# Altium PCB team throttle control.PcbDoc
Units mil, origin at the board's own origin, x right, y up, seen from the top; angles counter-clockwise.
Board outline 2987.01 x 2349.61 mil, 2 copper layers (Top, Bottom); 16 components, 19 nets, 108 pads, 0 vias.
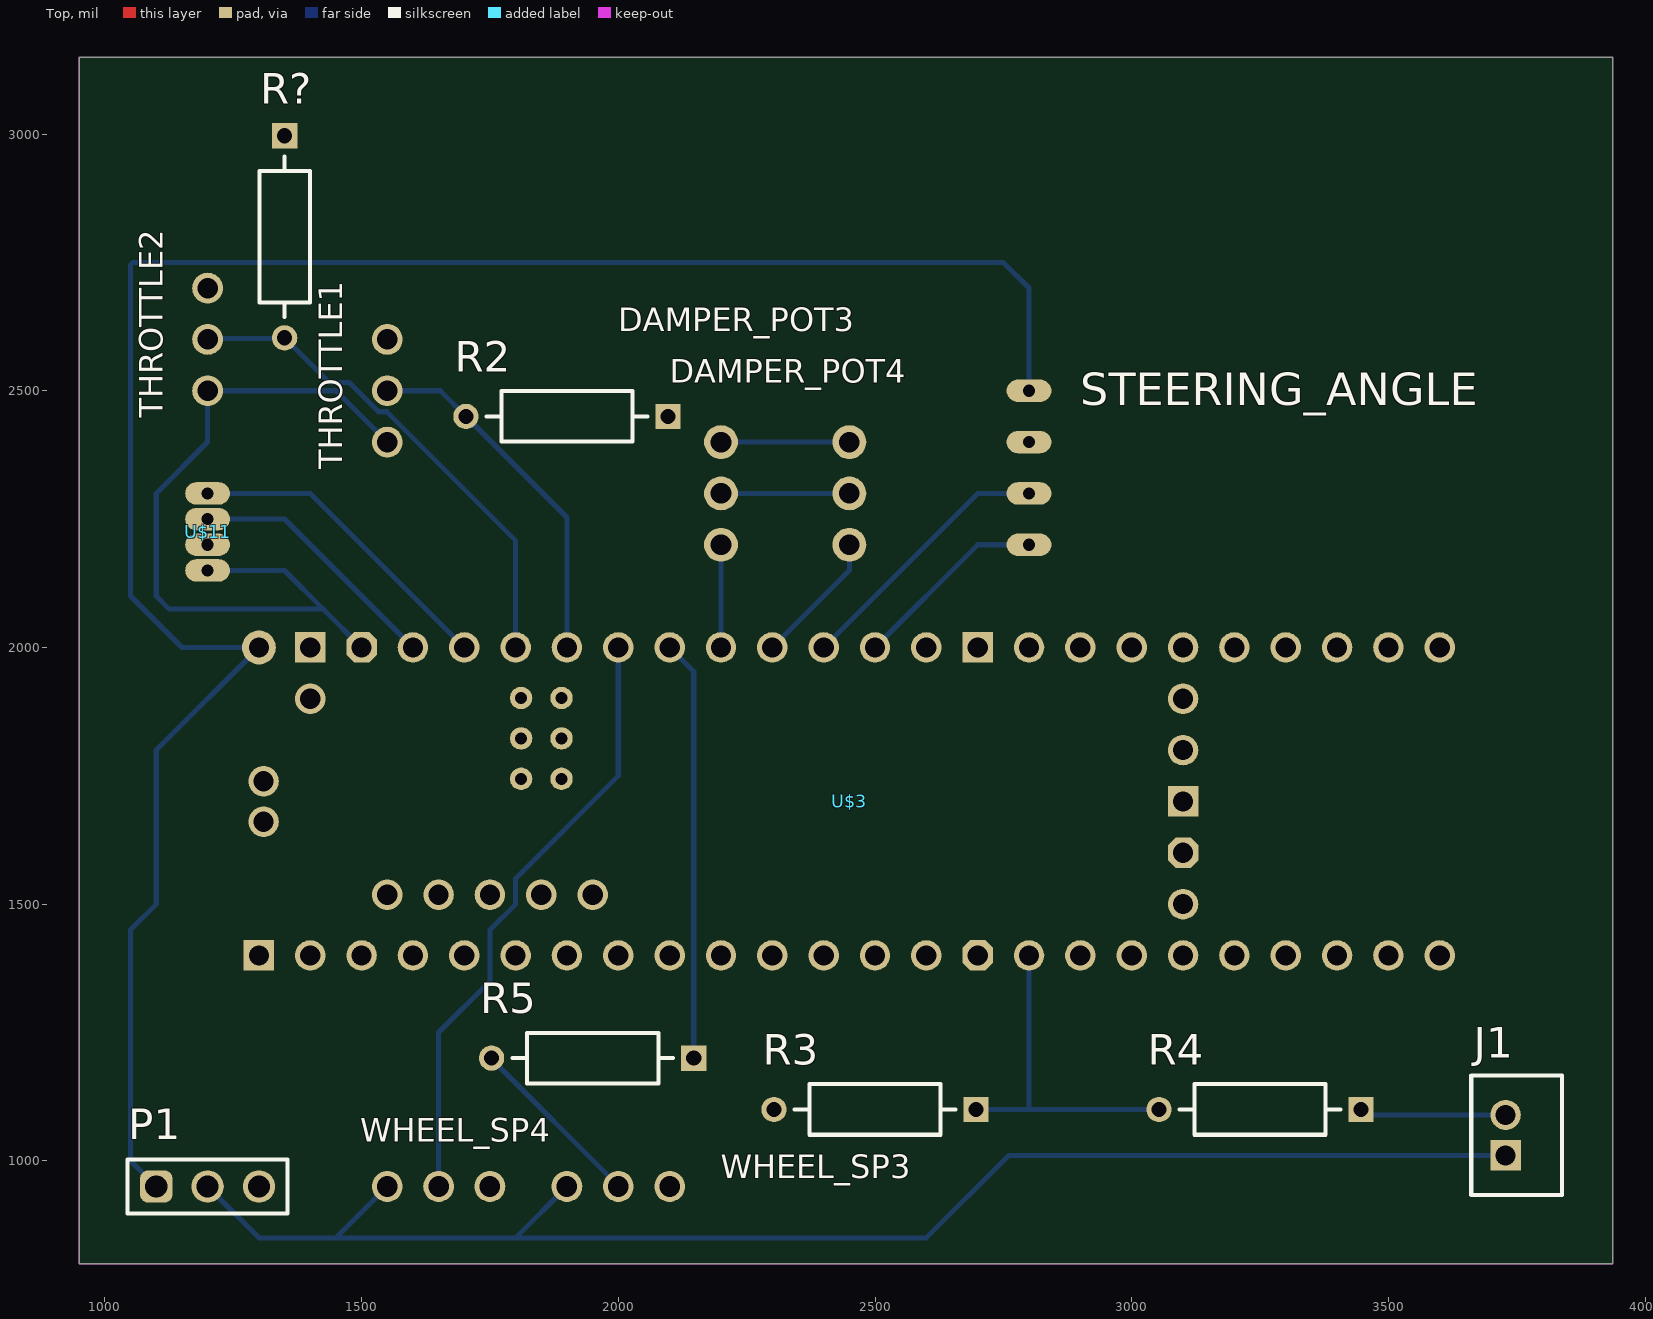
[diagram p0: Top view]
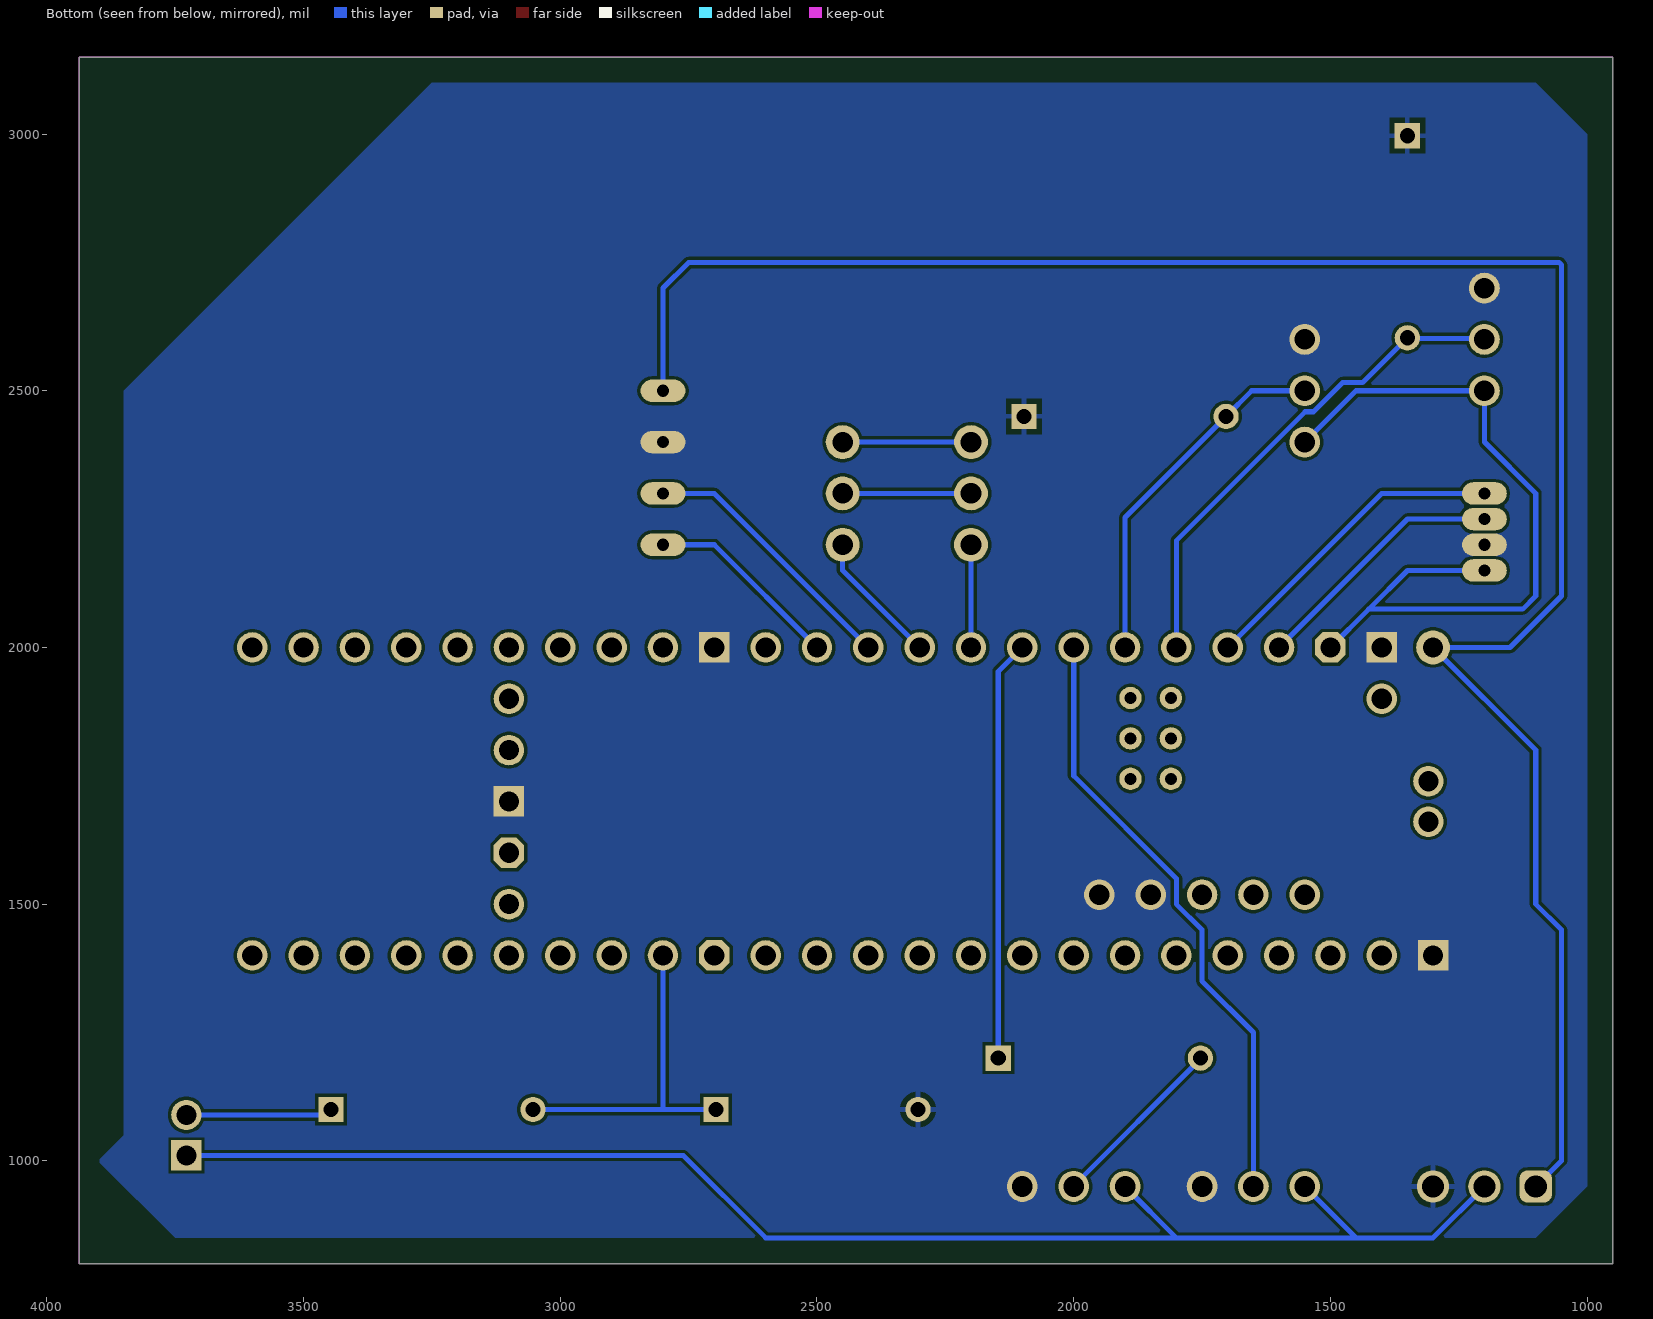
[diagram p1: Bottom view, seen from below]

## Layer stack, top to bottom
Top Solder: solder mask 0.4, Solder Resist, Dk 3.5
Top: signal copper 1.378
Dielectric 1: dielectric 12.6, FR-4, Dk 4.8
Bottom: signal copper 1.378
Bottom Solder: solder mask 0.4, Solder Resist, Dk 3.5

## Board outline
950,3149.61 950,800 3937.01,800 3937.01,3149.61

## Design rules (kind name [scope] priority, off if disabled: settings)
BoardOutlineClearance mdCopperDimension [All] p1: gap=10 ignorepadtopadclearanceinfootprint=FALSE except(0: Arc-SplitContinuation Track-SplitContinuation SMDPad-SplitContinuation THPad-SplitContinuation Via-SplitContinuation Fill-SplitContinuation Poly-SplitContinuation Region-SplitContinuation Text-SplitContinuation; 40: Poly-OutlineEdge Poly-CavityEdge Poly-CutoutEdge Poly-SplitBarrior)
Clearance "Clearance (Same Net)" [All] p1: gap=6 ignorepadtopadclearanceinfootprint=FALSE
Clearance [All] p2: gap=6 ignorepadtopadclearanceinfootprint=FALSE
HoleSize [All] p1: absolutevalues=TRUE maxlimit=100000 minlimit=13.78 maxpercent=80.000 minpercent=20.000
HoleToHoleClearance mdDrill [All] p1: gap=6 allowstackedmicrovias=TRUE
MinimumSolderMaskSliver [All] p1 off: minsoldermaskwidth=10
PasteMaskExpansion mlMinCreamFrame [All] p1: expansion=0
PolygonConnect PolygonConnect_For_PolygonThermal_ON_Width120000_Gap100000 [InPolygonClass('PolygonThermal_ON_Width120000_Gap100000') vs Not IsVia] p1: connectstyle=Relief reliefconductorwidth=12 reliefentries=4 polygonreliefangle="90 Angle" airgapwidth=10
PolygonConnect ThermalVias [IsVia] p2: connectstyle=Direct reliefconductorwidth=10 reliefentries=4 polygonreliefangle="90 Angle" airgapwidth=10
PolygonConnect [All] p3: connectstyle=Relief reliefconductorwidth=10 reliefentries=4 polygonreliefangle="90 Angle" airgapwidth=10
RoutingVias [All] p1: holewidth=13.78 width=29.78 viastyle="Through Hole" minholewidth=13.78 minwidth=29.78 maxholewidth=100 maxwidth=100
SolderMaskExpansion mlMinStopFrame [All] p1: expansion=4 istentingtop=FALSE
Width [All] p1: maxlimit=10 minlimit=6 preferedwidth=6
26 further rules are at their usual default settings.

## Components (designator, comment, footprint, x,y, rotation, side; value= is the part's Value field where it differs from the comment)
DAMPER_POT3 "" 1X03-CLEANBIG 2450,2300 r270 top
DAMPER_POT4 "" 1X03-CLEANBIG 2200,2300 r270 top
J1 "Break Switch" JST-B2B-PH-K-S_V 3750,1050 r90 top
P1 "Power header" 61300311121 1200,950 r0 top
R2 "470K" FP-MRS25-MFG 1900,2450 r180 top
R3 "3.3K" FP-MRS25-MFG 2500,1100 r180 top
R4 "100K" FP-MRS25-MFG 3250,1100 r180 top
R5 "1K" FP-MRS25-MFG 1950,1200 r180 top
R? "47K" FP-MRS25-MFG 1350,2800 r270 top
STEERING_ANGLE "" ROTARY_ENCODER 2750,2350 r0 top
THROTTLE1 "" 1X03 1550,2500 r90 top
THROTTLE2 "" 1X03 1200,2600 r90 top
U$3 "" TEENSY41 2500,1700 r0 top
U$11 "" CAN_TEN 1250,2050 r90 top
WHEEL_SP3 "" 1X03 2000,950 r0 top
WHEEL_SP4 "" 1X03 1650,950 r0 top

## Footprints (in the part's own frame and the unit in brackets; to place one, negate y for a bottom-side part, rotate by r counter-clockwise, add the part's x,y. Pads: shape width x height; smd on the part's side, far side on the other; paste and mask are expansions set on the pad)
1X03 [mil] "1X03"
  round 60 hole 40: 1(-100,0) 2(0,0) 3(100,0)
1X03-CLEANBIG [mil] "1X03-CLEANBIG"
  round 66 hole 40: 1(-100,0) 2(0,0) 3(100,0)
61300311121 [mm] "Pin Header, pitch 2.54 mm, THT, Vertical, single row, 3p"
  rrect50% 1.6x1.6 hole 1.1: 1(-2.54,0)
  round 1.6 hole 1.1: 2(0,0) 3(2.54,0)
  silkscreen extent -3.96,-1.35 3.96,1.35, body extent -3.81,-1.27 3.81,1.27, height 8.57
CAN_TEN [mil] "CAN_TEN"
  oval 43.62x87.24 hole 23.62: P$1(100,50) P$2(150,50) P$3(200,50) P$4(250,50)
FP-MRS25-MFG [mm]
  rect 1.25x1.25 hole 0.75 paste-2539.97 mask+0: 1(-5,0)
  round 1.25 hole 0.75 paste-2539.97 mask+0: 2(5,0)
  silkscreen extent -3.98,-1.25 3.98,1.25, body extent -5.72,-1.35 5.72,1.35, height 0.25
JST-B2B-PH-K-S_V [mm] "Connector, 2-Leads, Body 5.9x4.5mm, Pitch 2mm"
  rect 1.5x1.5 hole 1: 1(-1,0.55)
  round 1.5 hole 1: 2(1,0.55)
  silkscreen extent -2.95,-2.25 2.95,2.25, body extent -2.95,-2.25 2.95,2.25, height 6
ROTARY_ENCODER [mil] "ROTARY_ENCODER"
  oval 87.24x43.62 hole 23.62: GND(50,50) PH_A(50,-150) PH_B(50,-50) VCC(50,150)
TEENSY41 [mm] "TEENSY41"
  round 1.508 hole 1: 0-RX1/CS1/CRX2(-27.94,-7.62) 1-TX1/MISO1/CTX2(-25.4,-7.62) 2-OUT2(-22.86,-7.62) 3-LRCLK2(-20.32,-7.62) 4-BCLK2(-17.78,-7.62) 5-IN2(-15.24,-7.62) 6-OUT1D(-12.7,-7.62) 7-RX2/OUT1A(-10.16,-7.62) 8-TX2/IN2(-7.62,-7.62) 9-OUT1C(-5.08,-7.62) 10-CS\MQSR(-2.54,-7.62) 11-MOSI/CTX1(0,-7.62) 12-MISO/MQSL(2.54,-7.62) 13-SCK/LED(2.54,7.62) 14-A0/TX3/SPDIF_OUT(0,7.62) 15-A1/RX3/SPDIF_IN(-2.54,7.62) 16-A2/RX4/SCL1(-5.08,7.62) 17-A3/TX4/SDA1(-7.62,7.62) 18-A4/SDA0(-10.16,7.62) 19-A5/SCL0(-12.7,7.62) 20-A6/TX5/LRCLK1(-15.24,7.62) 21-A7/RX5/BCLK1(-17.78,7.62) 22-A8/CTX1(-20.32,7.62) 23-A9/CRX1/MCLK1(-22.86,7.62) 24-A10/TX6/SCL2(7.62,-7.62) 25-A11/RX6/SDA2(10.16,-7.62) 26-A12/MOSI1(12.7,-7.62) 27-A13/SCK1(15.24,-7.62) 28-RX7(17.78,-7.62) 29-TX7(20.32,-7.62) 30-CRX3(22.86,-7.62) 31-CTX3(25.4,-7.62) 32-OUT1B(27.94,-7.62) 33-MCLK2(27.94,7.62) 34-RX8(25.4,7.62) 35-TX8(22.86,7.62) 36-PWM(20.32,7.62) 37-PWM(17.78,7.62) 38-A14/CS/IN1(15.24,7.62) 39-A15/CS/OUT1A(12.7,7.62) 40-A16/CS1(10.16,7.62) 41-A17/MISO1(7.62,7.62) +5V(-24.13,-4.62) D+(-30.25,-1) D-(-30.25,1) DM(-21.59,-4.62) DP(-19.05,-4.62) GND4(-16.51,-4.62) GND5(-13.97,-4.62) ON/OFF(15.24,5.08) PROGRAM(15.24,2.54) VBAT(15.24,-5.08) VUSB(-27.94,5.08)
  oct 1.508x1.508 / inner round 1.393 / far side oct 1.508x1.508 hole 1: 3V3-1(5.08,-7.62) 3V3-2(15.24,-2.54) 3V3-3(-25.4,7.62)
  round 1.108 hole 0.6: G(-15.51,3.12) LED(-17.51,3.12) R+(-17.51,5.12) R-(-15.51,5.12) T+(-15.51,1.12) T-(-17.51,1.12)
  rect 1.508x1.508 / inner round 1.393 / far side rect 1.508x1.508 hole 1: GND1(-30.48,-7.62) GND2(15.24,0) GND3(5.08,7.62) GND6(-27.94,7.62)
  round 1.676 hole 1: VIN(-30.48,7.62)

## Part data
DAMPER_POT3 DAMPER_POT4: library part PINHD-1X3CB, "PIN HEADER", DeviceName=CB, DeviceSetName=PINHD-1X3, GateName_1=A, LibraryName=adafruit, SymbolName_1=PINHD3
J1: library part CMP-2000-05162-1, "Male Header, Pitch 2 mm, 1 x 2 Position, Height 6 mm, Tail Length 3.4 mm, -25 to 85 degC, RoHS, Bulk", Manufacturer=JST, Datasheet URL=http://datasheet.octopart.com/B2B-PH-K-S%28LF%29%28SN%29-JST-datasheet-8324864.pdf, Datasheet Version=Nov-08, Manufacturer URL=http://www.jst.com/home2.html, No of Positions=2, Pitch=2mm, Style/Orientation=StraightHeader/Plug, Termination=Crimp, Type=ShroudedHeader
P1: library part CMP-1502-01062-2, Color=Black, Contact Resistance=20mΩ, Current Rating=3A, Max Operating Temperature=105°C, Min Operating Temperature=-40°C, Operating Supply Voltage=250V, Connector Type="Male Pin", Contact Material=Copper, Contact Mating Length=5.9944mm, Contact Plating=Gold, Gender=Male, Height=8.94mm, Lead Free="Lead Free", Lead Pitch=2.54mm, Mount="Through Hole", NexarPartId=32855521, Number of Contacts=3, Number of Pins=3, Number of Positions=3, Number of Rows=1, Orientation=Vertical, Packaging=Bulk, Pitch=2.54mm, REACH SVHC=Unknown, RoHS=Compliant, Termination=Solder, Voltage Rating=250V
R2 R3 R4 R5 R?: library part CMP-00030-42757237-1, "MRS25000C1000FRP00 Resistor, 100 Ohm, ± 1%, 600 mW, Axial Leaded, Metal Film (Thin Film), Professional", Case/Package=Axial, Max Operating Temperature=155°C, Max Power Dissipation=600mW, Min Operating Temperature=-55°C, Resistance=100Ω, Temperature Coefficient=50ppm/°C, Tolerance=1%, Voltage Rating=350V, Composition="Metal Film, Thin Film", Contact Plating=Tin, Diameter=2.5mm, Lead Diameter=600µm, Lead Free="Lead Free", Length=6.5mm, Military Standard=Not, Mount="Through Hole", NexarPartId=42757237, Number of Pins=2, Number of Terminations=2, Packaging="Tape & Reel (TR)", Power Rating=600mW, Radiation Hardening=No, REACH SVHC=Unknown, RoHS=Compliant, Schedule B="8533210090, 8533210090", Termination=Axial, Voltage Rating (DC)=350V, Width=2.5mm
STEERING_ANGLE: library part ROTARY_ENCODER, DeviceSetName=ROTARY_ENCODER, GateName_1=G$1, LibraryName="F-E library custom components", SymbolName_1=ROTARY_ENCODER
THROTTLE1 THROTTLE2 WHEEL_SP3 WHEEL_SP4: library part PINHD-1X3, "PIN HEADER", DeviceSetName=PINHD-1X3, GateName_1=A, LibraryName=adafruit, SymbolName_1=PINHD3
U$3: library part TEENSY41, DeviceSetName=TEENSY41, GateName_1=G$1, LibraryName=teensy, SymbolName_1=TEENSY41, TEENSY4.1="TEENSY 4.1"
U$11: library part CAN_TEE, DeviceSetName=CAN_TEE, GateName_1=G$1, LibraryName="F-E library custom components", SymbolName_1=CAN_TEN

## Nets (pads, with @x,y where several pads share a name; then routed paths per layer and width w, separated by ;. In a path a pad name is that pad's centre, name@x,y a point inside that pad or via, vN(x,y) a via of type N, cw(c..) or ccw(c..) an arc to the next point about the centre after c; other vN are vias at no path point)
3.3V: THROTTLE1.1 THROTTLE2.1 U$3.3V3-3 U$11.P$1 | length 1530.9
  Bottom w10: U$11.P$1 1350,2150 1425.41,2074.59 ; U$3.3V3-3 1425.41,2074.59 ; THROTTLE1.1 1450,2500 THROTTLE2.1 1200,2400 1100,2300 1100,2100 1125.41,2074.59 1425.41,2074.59
5V: P1.1 STEERING_ANGLE.VCC U$3.VIN | length 4083.7
  Bottom w10: P1.1 1050,1000 1050,1450 1100,1500 1100,1800 U$3.VIN 1150,2000 1050,2100 1050,2745.31 1054.69,2750 2750,2750 2800,2700 STEERING_ANGLE.VCC
12V: J1.1 P1.2 WHEEL_SP3.1 WHEEL_SP4.1 | length 2919.1
  Bottom w10: P1.2 1300,850 1450,850 ; WHEEL_SP4.1 1450,850 ; WHEEL_SP3.1 1800,850 ; J1.1 2760.63,1010.63 2600,850 1800,850 ; 1450,850 1800,850
A2_2: DAMPER_POT3.3 U$3.16-A2/RX4/SCL1 | length 262.1
  Bottom w10: U$3.16-A2/RX4/SCL1 2450,2150 DAMPER_POT3.3
ACC_DATA_OUT_1: R2.2 THROTTLE1.2 U$3.20-A6/TX5/LRCLK1 | length 707.6
  Bottom w10: THROTTLE1.2@1551.57,2501.57 THROTTLE1.2 1653.15,2500 R2.2 1900,2253.15 U$3.20-A6/TX5/LRCLK1
ACC_DATA_OUT_2: R?.2 THROTTLE2.2 U$3.21-A7/RX5/BCLK1 | length 973
  Bottom w10: THROTTLE2.2 1201.57,2601.57 1348.43,2601.57 R?.2 1437.15,2516 1476.02,2516 1533.02,2459 1548.98,2459 1800,2207.98 U$3.21-A7/RX5/BCLK1
BL_GND: DAMPER_POT3.2 DAMPER_POT4.2 | length 250
  Bottom w10: DAMPER_POT4.2 DAMPER_POT3.2
BR_SW: R3.1 R4.2 U$3.24-A10/TX6/SCL2 | length 656.3
  Bottom w10: R3.1 2800,1100 ; U$3.24-A10/TX6/SCL2 2800,1100 ; R4.2 2800,1100
BR_VCC: DAMPER_POT3.1 DAMPER_POT4.1 | length 250
  Bottom w10: DAMPER_POT4.1 DAMPER_POT3.1
CRX_2: U$3.23-A9/CRX1/MCLK1 U$11.P$3 | length 503.6
  Bottom w10: U$11.P$3 1350,2250 U$3.23-A9/CRX1/MCLK1
CTX_2: U$3.22-A8/CTX1 U$11.P$4 | length 624.3
  Bottom w10: U$11.P$4 1400,2300 U$3.22-A8/CTX1
GND: P1.3 R2.1 R3.2 R?.1 STEERING_ANGLE.GND THROTTLE1.3 THROTTLE2.3 U$3.GND1 U$3.GND2 U$3.GND3 U$3.GND4 U$3.GND5 U$3.GND6 U$11.P$2 WHEEL_SP3.3 WHEEL_SP4.3
NetDAMPER_POT4_3: DAMPER_POT4.3 U$3.17-A3/TX4/SDA1 | length 200
  Bottom w10: U$3.17-A3/TX4/SDA1 DAMPER_POT4.3
NetJ1_2: J1.2 R4.1 | length 285.9
  Bottom w10: R4.1 3457.48,1089.37 J1.2
NetR5_1: R5.1 U$3.18-A4/SDA0 | length 819.4
  Bottom w10: U$3.18-A4/SDA0 2146.85,1953.15 R5.1
NetR5_2: R5.2 WHEEL_SP3.2 | length 352.2
  Bottom w10: R5.2 1753.15,1198.43 2000,951.57 WHEEL_SP3.2
T2_DP_1: STEERING_ANGLE.PH_A U$3.14-A0/TX3/SPDIF_OUT | length 382.8
  Bottom w10: U$3.14-A0/TX3/SPDIF_OUT 2700,2200 STEERING_ANGLE.PH_A
T2_DP_2: STEERING_ANGLE.PH_B U$3.15-A1/RX3/SPDIF_IN | length 524.3
  Bottom w10: U$3.15-A1/RX3/SPDIF_IN 2700,2300 STEERING_ANGLE.PH_B
WH_SP4_D: U$3.19-A5/SCL0 WHEEL_SP4.2 | length 1195
  Bottom w10: WHEEL_SP4.2 1650,1250 1750,1350 1750,1450 1800,1500 1800,1550 2000,1750 U$3.19-A5/SCL0
pads on no net: U$3.0-RX1/CS1/CRX2 U$3.1-TX1/MISO1/CTX2 U$3.2-OUT2 U$3.3-LRCLK2 U$3.3V3-1 U$3.3V3-2 U$3.4-BCLK2 U$3.5-IN2 U$3.6-OUT1D U$3.7-RX2/OUT1A U$3.8-TX2/IN2 U$3.9-OUT1C U$3.10-CS\MQSR U$3.11-MOSI/CTX1 U$3.12-MISO/MQSL U$3.13-SCK/LED U$3.25-A11/RX6/SDA2 U$3.26-A12/MOSI1 U$3.27-A13/SCK1 U$3.28-RX7 U$3.29-TX7 U$3.30-CRX3 U$3.31-CTX3 U$3.32-OUT1B U$3.33-MCLK2 U$3.34-RX8 U$3.35-TX8 U$3.36-PWM U$3.37-PWM U$3.38-A14/CS/IN1 U$3.39-A15/CS/OUT1A U$3.40-A16/CS1 U$3.41-A17/MISO1 U$3.+5V U$3.D+ U$3.D- U$3.DM U$3.DP U$3.G U$3.LED U$3.ON/OFF U$3.PROGRAM U$3.R+ U$3.R- U$3.T+ U$3.T- U$3.VBAT U$3.VUSB

## Polygon pours and split planes (outlines as drawn)
GND on Bottom "GND_L02_P000" (solid, pour order 0): 1100,3100 1000,3000 1000,950 1100,850 3750,850 3900,1000 3850,1050 3850,2500 3250,3100

## Keep-outs
Keep-Out Layer:
  the board outline again, w0

## Silkscreen, mask and mechanical layers (free items; w line width, h text height)
Dimension:
  the board outline again, w0

## Text inside footprints (layer, text, board x,y; h text height)
U$3: tPlace "TEENSY 4.1" at 2200,1700 h77.5; tPlace "USB" at 1409.89,1655.74 h49.6 r90; tPlace "3 VOLT" at 2945,1510 h37.2; tPlace "COIN CEL" at 2910,1483 h37.2; tPlace "POGO" at 1370.78,1653.76 h37.2 r90